# Altium PCB PCB1.PcbDoc
Units mm, origin at the board's own origin, x right, y up, seen from the top; angles counter-clockwise.
Board outline 98.17 x 87.76 mm, 2 copper layers (Top Layer, Bottom Layer); 27 components, 38 nets, 142 pads, 13 vias.
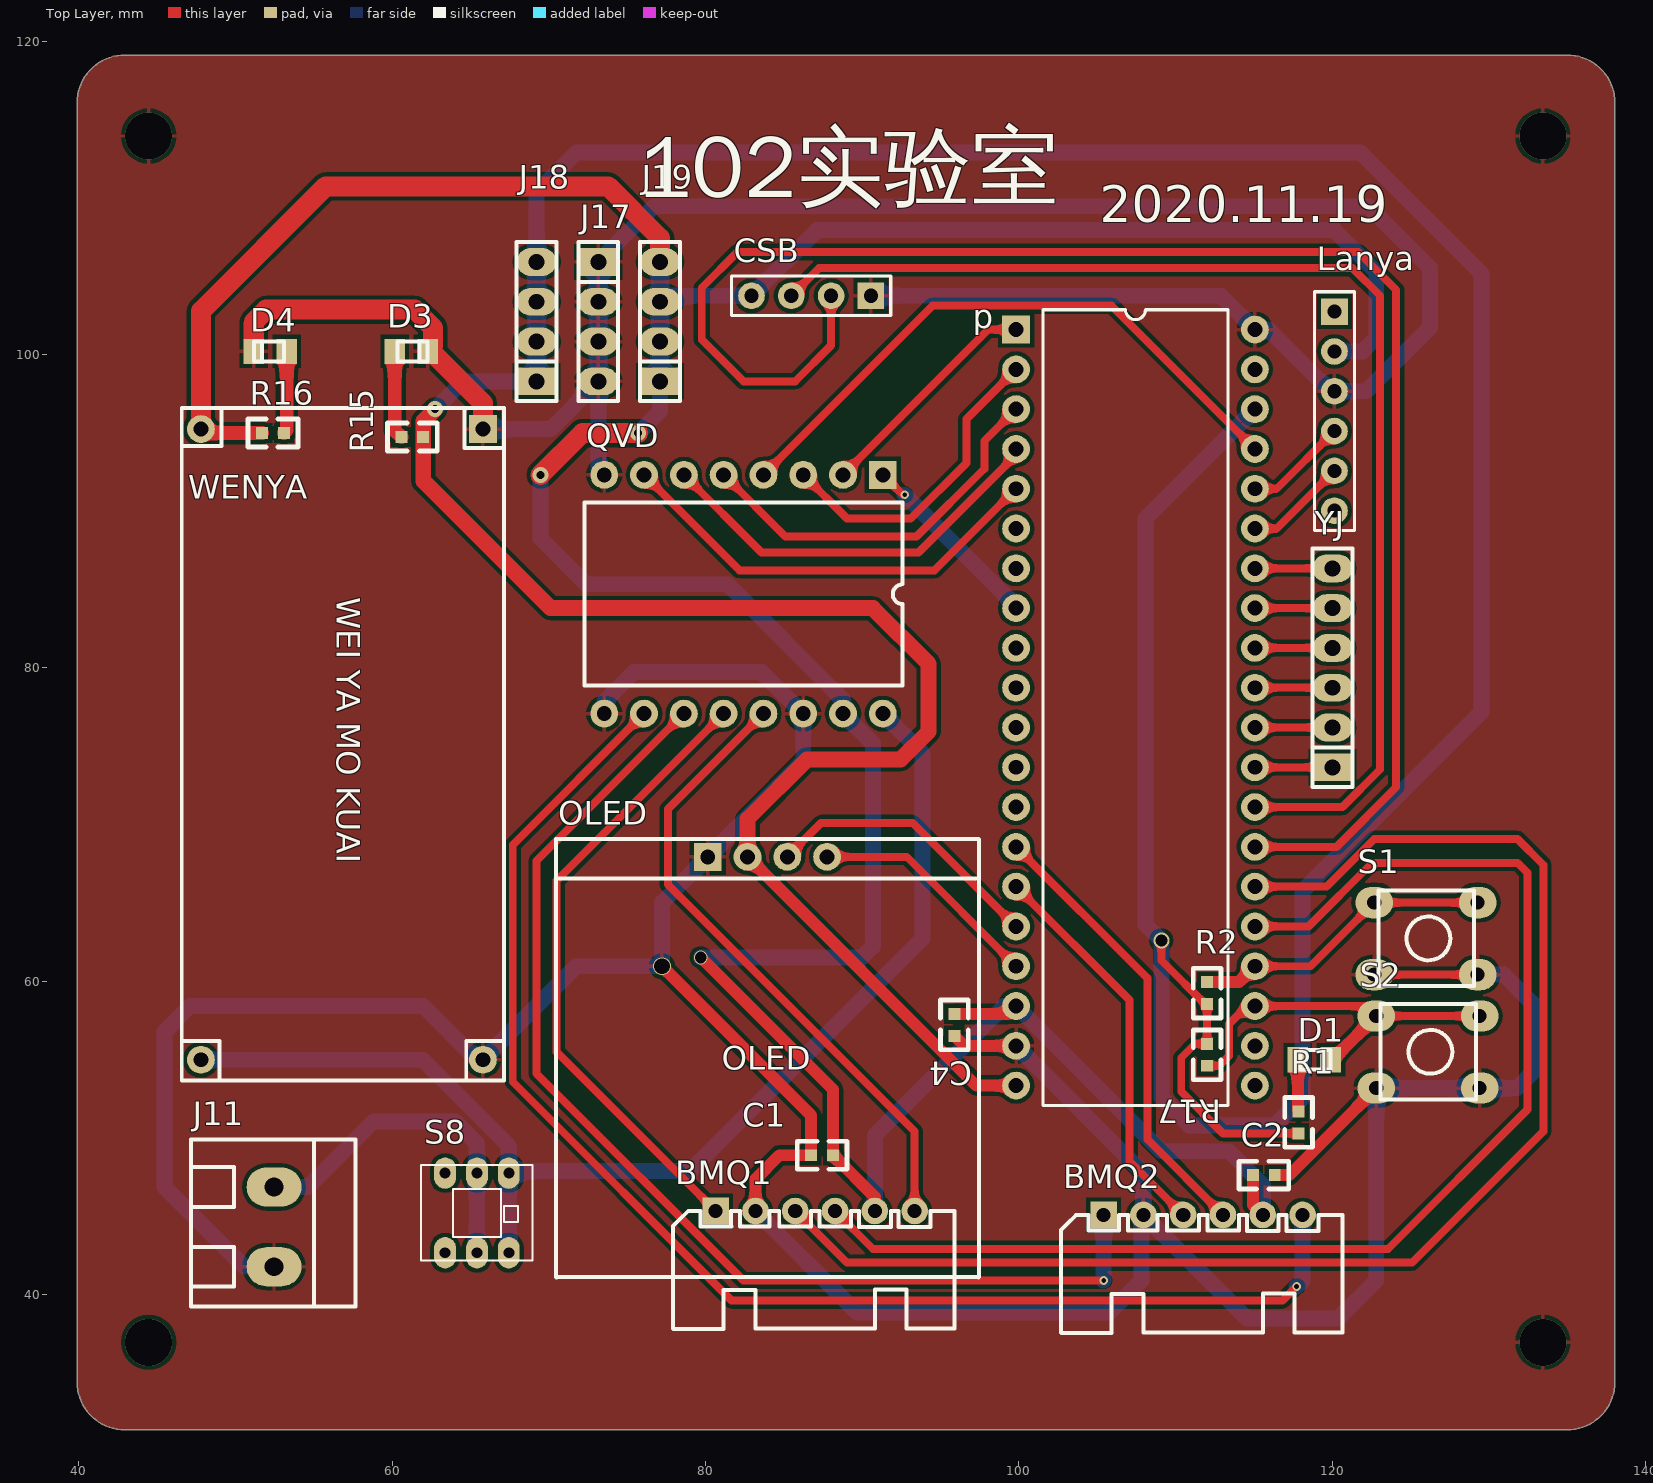
[diagram p0: Top Layer view]
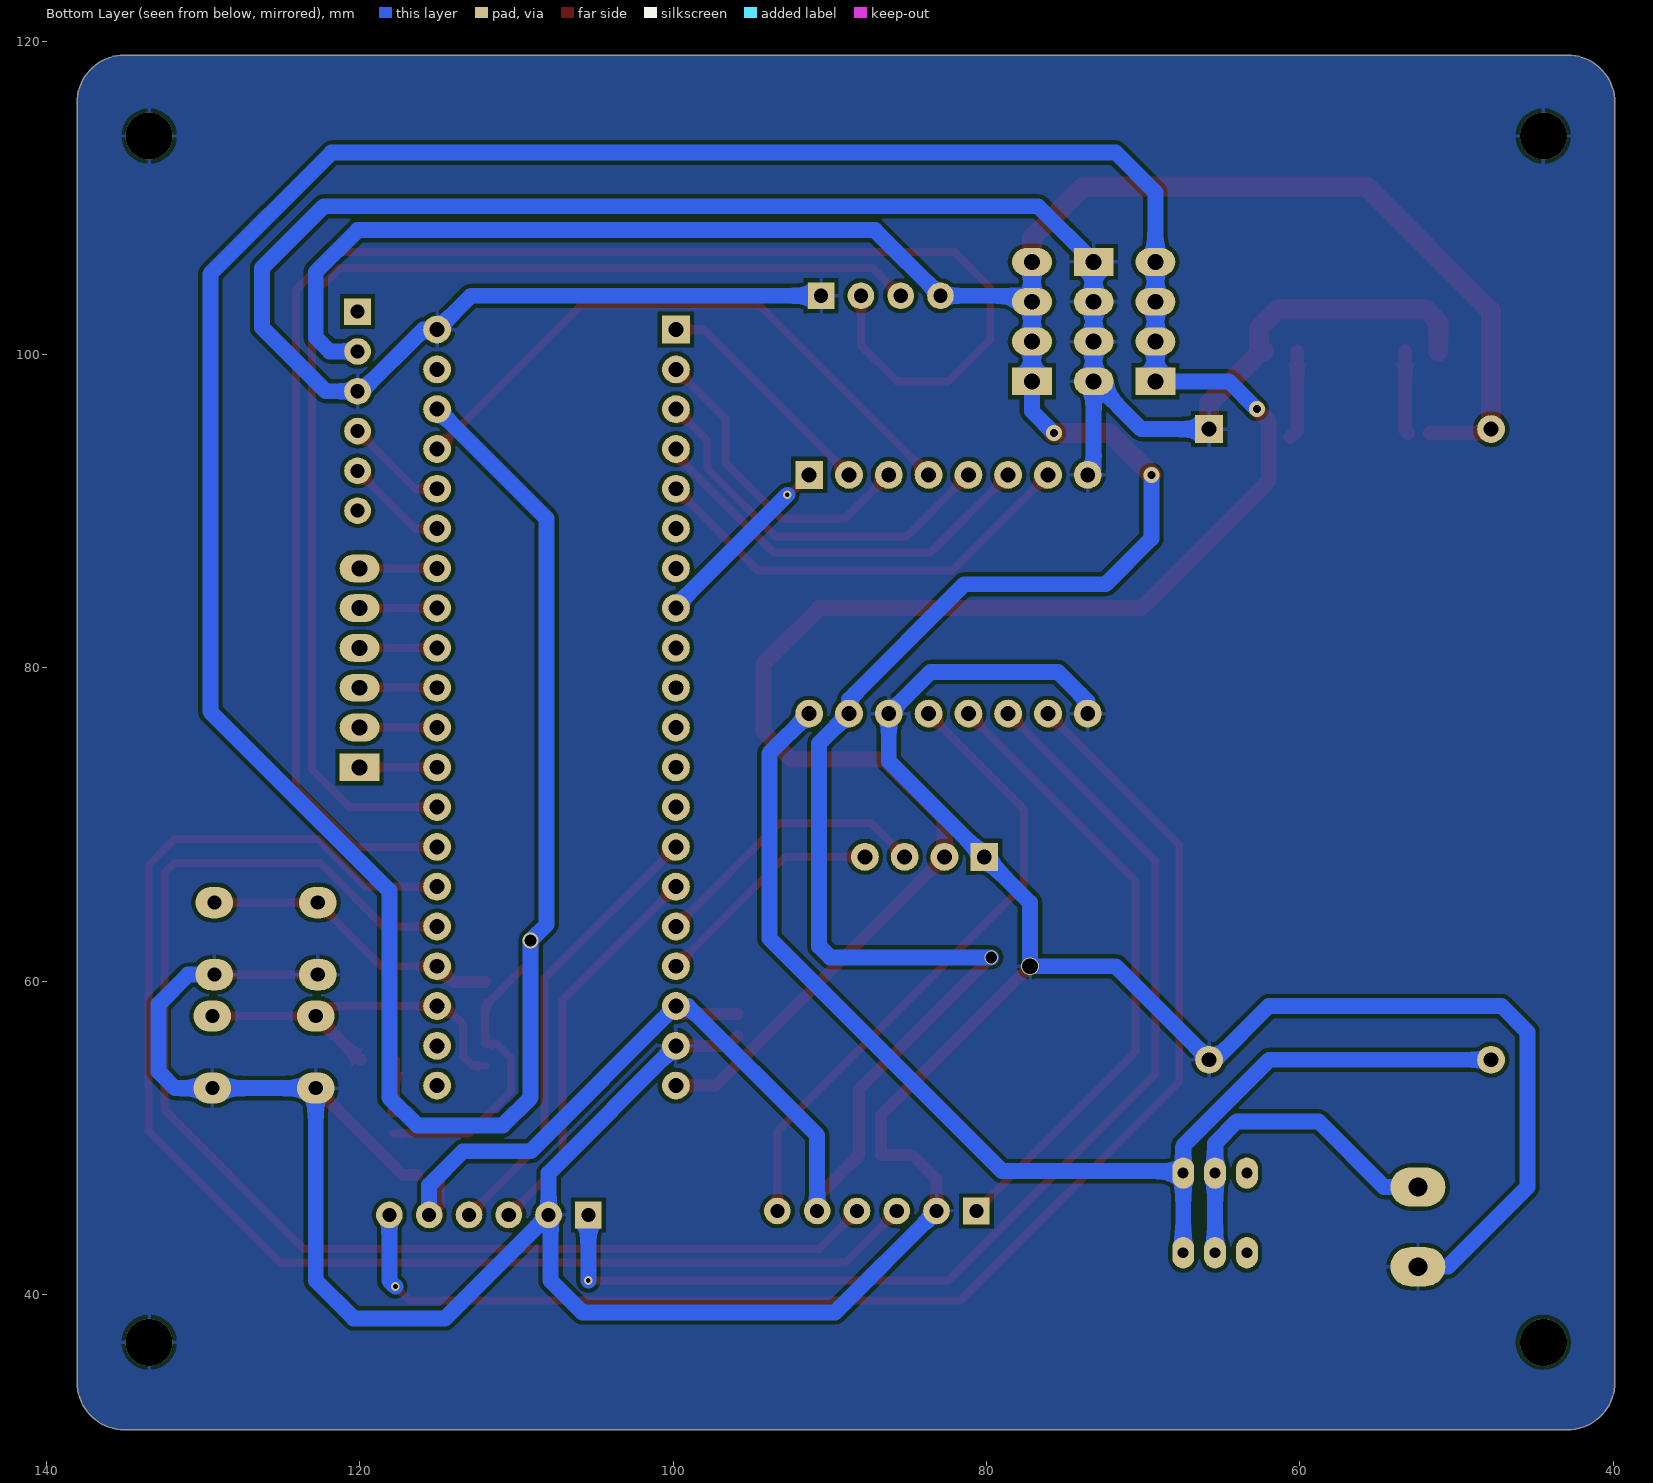
[diagram p1: Bottom Layer view, seen from below]

## Layer stack, top to bottom
Top Solder: solder mask 0.0102, Solder Resist, Dk 3.5
Top Layer: signal copper 0.0356
Dielectric 1: dielectric 0.32, FR-4, Dk 4.8
Bottom Layer: signal copper 0.0356
Bottom Solder: solder mask 0.0102, Solder Resist, Dk 3.5

## Board outline
39.878,34.417 39.878,116.078 cw(c42.926,116.078) 42.926,119.126 135.001,119.126 cw(c135.001,116.078) 138.049,116.078 138.049,34.417 cw(c135.001,34.417) 135.001,31.369 42.926,31.369 cw(c42.926,34.417)

## Design rules (kind name [scope] priority, off if disabled: settings)
Clearance [All] p1: gap=0.254 ignorepadtopadclearanceinfootprint=FALSE except(0: Arc-Hole Track-Hole SMDPad-Hole THPad-Hole Via-Hole Fill-Hole Poly-Hole Region-Hole Text-Hole)
PolygonConnect [All] p1: connectstyle=Relief reliefconductorwidth=0.254 reliefentries=4 polygonreliefangle="90 Angle" airgapwidth=0.254
RoutingVias [All] p1: holewidth=0.711 width=1.27 viastyle="Through Hole" minholewidth=0.711 minwidth=1.27 maxholewidth=0.711 maxwidth=1.27
SolderMaskExpansion [All] p1: expansion=0.102
Width [All] p1: maxlimit=2.032 minlimit=0.254 preferedwidth=1.016
30 further rules are at their usual default settings.

## Components (designator, comment, footprint, x,y, rotation, side; value= is the part's Value field where it differs from the comment)
BMQ1 "HDR-1X6" XH2.54-WI-6P 86.995,45.339 r0 top
BMQ2 "HDR-1X6" XH2.54-WI-6P 111.76,45.085 r0 top
C1 "100nf" 0603 88.138,48.895 r180 top
C2 "100nf" 0603 114.935,47.625 r0 top
C4 "CAP1" 0603 95.885,57.912 r270 top
CSB "CON4" HDR2.54-M-LI-4P 86.741,103.759 r180 top
D1 "LED" LED_0805 118.872,54.991 r0 top
D3 "LED" LED_0805 61.224,100.203 r0 top
D4 "LED" LED_0805 52.197,100.203 r180 top
J11 "CON2" KF128-5.08-2P 52.451,44.323 r270 top
J17 "CON4" sip-4 73.152,105.918 r270 top
J18 "CON4" sip-4 69.215,98.298 r90 top
J19 "CON4" sip-4 77.089,98.298 r90 top
Lanya "CON6" HDR2.54-M-LI-6P 120.142,96.393 r270 top
OLED "CON4" OLED 80.137,67.945 r0 top
p "STM32单片机最小系统" "PCBComponent_1 - duplicate" 110.109,77.724 r0 top
QVD "电机驱动" DIP16P 91.313,92.329 r270 top
R1 "1K" 0603 117.856,50.292 r90 top
R2 "10K" 0603 112.014,58.547 r90 top
R15 "1K" 0603 61.976,94.742 r180 top
R16 "1K" 0603 51.689,94.996 r0 top
R17 "10K" 0603 112.014,56.007 r270 top
S1 "SW-PB" SW6*6 122.686,65.024 r0 top
S2 "SW-PB" SW6*6 122.813,57.785 r0 top
S8 "SW-DPDT" SWH7*7 63.373,47.752 r0 top
WENYA "CON4" "WEI YA" 65.786,95.25 r270 top
YJ "CON6" sip-6 120.015,73.66 r90 top

## Footprints (in the part's own frame and the unit in brackets; to place one, negate y for a bottom-side part, rotate by r counter-clockwise, add the part's x,y. Pads: shape width x height; smd on the part's side, far side on the other; paste and mask are expansions set on the pad)
0603 [mil]
  rect 30x30 smd: 1(0,0) 2(55,0)
  silkscreen extent -35,-35 90,35
DIP16P [mil]
  rect 70x70 hole 37.5: 1(0,0)
  round 70 hole 37.5: 2(0,-100) 3(0,-200) 4(0,-300) 5(0,-400) 6(0,-500) 7(0,-600) 8(0,-700) 9(600,-700) 10(600,-600) 11(600,-500) 12(600,-400) 13(600,-300) 14(600,-200) 15(600,-100) 16(600,0)
  silkscreen extent 70,-750 530,50
HDR2.54-M-LI-4P [mm] "排母，4脚  淘宝ID:黄晶宝石   店铺网址:https://shop463601444.taobao.com"
  rect 1.7x1.7 hole 0.9: 1(-3.81,0)
  round 1.7 hole 0.9: 2(-1.27,0) 3(1.27,0) 4(3.81,0)
  silkscreen extent -5.08,-1.27 5.08,1.27, body extent -5.08,-1.27 5.08,1.27, height 8.5
HDR2.54-M-LI-6P [mm] "排母，6脚  淘宝ID:黄晶宝石   店铺网址:https://shop463601444.taobao.com"
  rect 1.7x1.7 hole 0.9: 1(-6.35,0)
  round 1.7 hole 0.9: 2(-3.81,0) 3(-1.27,0) 4(1.27,0) 5(3.81,0) 6(6.35,0)
  silkscreen extent -7.62,-1.27 7.62,1.27, body extent -7.62,-1.27 7.62,1.27, height 8.5
KF128-5.08-2P [mm] "螺钉式接线端子，脚距5.08mm"
  oval 2.5x3.5 hole 1.2: 1(-2.54,0) 2(2.54,0)
  silkscreen extent -5.59,-5.31 5.08,5.21, body extent -5.58,-5.3 5.08,5.2, height 14.15
LED_0805 [mm]
  rect 1.3x1.6 smd: 1(-1.067,0) 2(1.041,0)
  silkscreen extent -0.89,-0.64 1.02,0.64
OLED [mil]
  rect 70x70 hole 37.5: 1(0,0)
  round 70 hole 37.5: 2(100,0) 3(200,0) 4(300,0)
  silkscreen extent -381,-1057 681,45, body extent -375,50 -375,50, height 10
"PCBComponent_1 - duplicate" [mil]
  round 70 hole 37.4: 1(195,940) 2(195,840) 3(195,740) 4(195,640) 5(195,540) 6(195,440) 7(195,340) 8(195,240) 9(195,140) 10(195,40) 11(195,-60) 12(195,-160) 13(195,-260) 14(195,-360) 15(195,-460) 16(195,-560) 17(195,-660) 18(195,-760) 19(195,-860) 20(195,-960) 21(-405,-960) 22(-405,-860) 23(-405,-760) 24(-405,-660) 25(-405,-560) 26(-405,-460) 27(-405,-360) 28(-405,-260) 29(-405,-160) 30(-405,-60) 31(-405,40) 32(-405,140) 33(-405,240) 34(-405,340) 35(-405,440) 36(-405,540) 37(-405,640) 38(-405,740) 39(-405,840)
  rect 70x70 hole 37.4: 40(-405,940)
  silkscreen extent -337,-1010 127,990
sip-4 [mil]
  rect 70x100 hole 40: 1(0,0)
  oval 70x100 hole 40: 2(100,0) 3(200,0) 4(300,0)
  silkscreen extent -50,-50 350,50
sip-6 [mil]
  rect 70x100 hole 40: 1(0,0)
  oval 70x100 hole 40: 2(100,0) 3(200,0) 4(300,0) 5(400,0) 6(500,0)
  silkscreen extent -50,-50 550,50
SW6*6 [mm]
  oval 2.4x2 hole 0.9: 1(0,0) 1(6.6,0) 2(0,-4.6) 2(6.6,-4.6)
  silkscreen extent 0.28,-5.34 6.38,0.76
SWH7*7 [mm]
  oval 1.4x2 hole 0.7: 1(0,0) 2(2.032,0) 3(4.064,0) 4(4.064,-5.08) 5(2.032,-5.08) 6(0,-5.08)
  silkscreen extent -1.52,-5.59 5.59,0.51
"WEI YA" [mil]
  rect 70x70 hole 37.5: 1(0,0)
  round 70 hole 37.5: 2(0,-708.66) 3(1585,0) 4(1585,-708.66)
  silkscreen extent -53,-757 1638,53
XH2.54-WI-6P [mm] "接插件，6P"
  rect 1.7x1.7 hole 0.9: 1(-6.35,0)
  round 1.7 hole 0.9: 2(-3.81,0) 3(-1.27,0) 4(1.27,0) 5(3.81,0) 6(6.35,0)
  silkscreen extent -9.07,-7.53 8.89,0, body extent -8.85,-7.35 8.85,0.35, height 5.75

## Part data
BMQ1 BMQ2: library part "Header 6", "6P接插件", BOM名称=6P接插件, 学习资源=https://shop463601444.taobao.com, 版权归属="封装库来自淘宝 ID：黄晶宝石"
C1 C2: library part CAP1
CSB J11 J17 J18 J19 Lanya OLED WENYA YJ: "Connector"
p QVD: library part Component_1
R1 R2 R15 R16 R17: library part RES, "电阻"

## Via types
v1: diameter 3, hole 3, Top Layer to Bottom Layer, 4 vias
v2: diameter 1.016, hole 0.508, Top Layer to Bottom Layer, 3 vias
v3: diameter 0.559, hole 0.305, Top Layer to Bottom Layer, 3 vias
v4: diameter 1.016, hole 0.762, Top Layer to Bottom Layer, 1 vias
v5: diameter 1.143, hole 1.016, Top Layer to Bottom Layer, 1 vias
v6: diameter 0.889, hole 0.762, Top Layer to Bottom Layer, 1 vias

## Nets (pads, with @x,y where several pads share a name; then routed paths per layer and width w, separated by ;. In a path a pad name is that pad's centre, name@x,y a point inside that pad or via, vN(x,y) a via of type N, cw(c..) or ccw(c..) an arc to the next point about the centre after c; other vN are vias at no path point)
3V3: J18.1 J18.2 J18.3 J18.4 OLED.2 p.3 p.21 R1.1 R2.1 R15.1 R17.1 | length 305.5
  Top Layer w0.508: v4@108.966,62.484 v4(109.093,62.611) 109.093,61.341 112.014,58.42 R17.1 111.252,56.007 110.363,55.118 110.363,52.959 113.03,50.292 R1.1
  Top Layer w0.762: OLED.2 97.282,53.34 p.21
  Top Layer w1.016: v2(62.738,96.52) 61.976,95.758 R15.1 61.976,91.948 70.104,83.82 90.678,83.82 94.234,80.264 94.234,75.946 92.456,74.168 86.487,74.168 82.677,70.358 OLED.2
  Bottom Layer w1.016: v2(62.738,96.52) 64.516,98.298 J18.1 J18.2 J18.3 J18.4 69.215,110.363 71.755,112.903 121.793,112.903 129.54,105.156 129.54,77.216 118.11,65.786 118.11,52.578 116.332,50.8 110.871,50.8 109.093,52.578 v4(109.093,62.611) 108.077,63.627 108.077,89.535 p.3
5V: BMQ1.5 BMQ2.5 C1.1 C2.1 C4.1 CSB.4 J19.1 J19.2 J19.3 J19.4 Lanya.2 p.23 QVD.15 R16.1 WENYA.2 | length 244.6
  Top Layer w0.762: v6(79.692,61.531) 88.138,53.086 C1.1 90.805,46.228 BMQ1.5 ; C4.1 99.314,57.912 p.23 ; C2.1 114.935,45.72 BMQ2.5
  Top Layer w0.889: WENYA.2 48.04,94.996 R16.1
  Top Layer w1.27: WENYA.2 47.786,102.777 55.753,110.744 73.787,110.744 77.089,107.442 J19.4 ; v2(69.469,92.329) 72.136,94.996 v2(75.692,94.996)
  Bottom Layer w1.016: v2(69.469,92.329) 69.469,88.265 72.39,85.344 81.407,85.344 88.773,77.978 QVD.15 90.678,75.184 90.678,62.23 89.98,61.531 v6(79.692,61.531) ; v2(75.692,94.996) 77.089,96.393 J19.1 J19.2 J19.3 ; J19.4 J19.3 ; BMQ1.5 90.805,50.165 99.06,58.42 p.23 109.093,49.149 113.411,49.149 115.57,46.99 BMQ2.5 ; Lanya.2 121.92,100.203 122.813,101.096 122.813,105.279 120.142,107.95 87.122,107.95 CSB.4 77.47,103.759 J19.3
12V: QVD.16 S8.3 S8.4 WENYA.4 | length 76.8
  Bottom Layer w1.016: WENYA.4 61.948,54.991 67.437,49.502 S8.3 ; S8.4 S8.3 ; QVD.16 93.853,74.549 93.853,62.738 78.994,47.879 67.564,47.879 S8.3
A01: BMQ1.6 QVD.13 | length 40.8
  Top Layer w0.508: QVD.13 77.597,70.993 77.597,66.167 93.345,50.419 BMQ1.6
A02: BMQ1.1 QVD.12 | length 40.4
  Top Layer w0.508: BMQ1.1 70.485,55.499 70.485,66.421 QVD.12
B01: BMQ2.6 QVD.10 | length 87.9
  Top Layer w0.508: QVD.10 67.691,68.707 67.691,53.594 81.661,39.624 116.84,39.624 v3(117.729,40.513)
  Bottom Layer w1.016: v3(117.729,40.513) 118.11,40.894 BMQ2.6
B02: BMQ2.1 QVD.11 | length 72.7
  Top Layer w0.508: QVD.11 69.215,67.691 69.215,54.102 82.423,40.894 v3(105.41,40.894)
  Bottom Layer w1.016: v3(105.41,40.894) BMQ2.1
GND: BMQ1.2 BMQ2.2 C1.2 C2.2 C4.2 CSB.1 D3.2 D4.2 J11.2 J17.1 J17.2 J17.3 J17.4 Lanya.3 OLED.1 p.1 p.22 QVD.8 QVD.9 QVD.14 S1.2 S2.2 WENYA.1 WENYA.3 | length 373.5
  Top Layer w0.508: S1.2@122.686,60.424 S1.2@129.286,60.424
  Top Layer w0.762: v5(77.216,60.96) 86.741,51.435 C1.2 84.709,48.895 83.185,47.371 BMQ1.2 ; C4.2 96.52,55.88 p.22 ; C2.2 117.253,47.625 S2.2@122.813,53.185
  Top Layer w1.27: D4.2 51.156,102.083 51.943,102.87 61.45,102.87 62.611,101.709 62.611,100.548 D3.2 62.484,100.203 65.786,96.901 WENYA.1
  Bottom Layer w1.016: J11.2 50.546,41.783 45.466,46.863 45.466,56.769 47.117,58.42 61.976,58.42 65.405,54.991 WENYA.3 71.755,60.96 v5(77.216,60.96) 77.216,65.024 OLED.1 86.233,74.041 QVD.14 83.566,79.756 75.438,79.756 73.533,77.851 QVD.9 ; WENYA.1 70.104,95.25 J17.4 ; QVD.8 73.152,92.71 J17.4 ; BMQ1.2 89.662,38.862 105.791,38.862 107.823,40.894 107.823,44.958 BMQ2.2 ; CSB.1 112.903,103.759 p.1 115.951,101.6 119.888,97.663 Lanya.3 122.174,97.663 126.238,101.727 126.238,105.537 122.301,109.474 76.708,109.474 J17.1 J17.2 J17.3 J17.4 ; p.22 107.95,47.752 BMQ2.2 ; S1.2@129.286,60.424 130.965,60.424 132.842,58.547 132.842,54.229 131.798,53.185 129.413,53.185 122.813,53.185 122.813,40.898 120.396,38.481 114.554,38.481 BMQ2.2
  other v1: 133.45,36.957 44.45,113.957 133.45,113.957
NetD1_1: D1.1 R1.2 | length 3.3
  Top Layer w0.762: D1.1 117.805,51.74 R1.2
NetD3_1: D3.1 R15.2 | length 5.6
  Top Layer w0.889: D3.1 60.158,95.163 R15.2
NetD4_1: D4.1 R16.2 | length 5.3
  Top Layer w0.889: R16.2 53.264,95.174 D4.1
NetJ11_1: J11.1 S8.2 S8.5 | length 22.3
  Bottom Layer w1.016: J11.1 54.61,46.863 58.801,51.054 64.008,51.054 65.405,49.657 S8.2 S8.5
Netp_4: p.4 QVD.4 | length 40
  Top Layer w0.508: QVD.4@83.693,92.71 QVD.4 94.488,103.124 105.918,103.124 p.4
PA0: BMQ1.4 p.16 | length 83.3
  Top Layer w0.508: BMQ1.4 90.678,42.926 123.571,42.926 132.461,51.816 132.461,66.929 131.826,67.564 122.555,67.564 118.491,63.5 p.16
PA1: BMQ1.3 p.15 | length 90
  Top Layer w0.508: BMQ1.3 89.027,42.037 125.095,42.037 133.477,50.419 133.477,67.437 131.826,69.088 122.682,69.088 119.634,66.04 p.15
PA2: CSB.2 p.14 | length 105.4
  Top Layer w0.508: CSB.2 88.011,100.584 85.725,98.298 82.423,98.298 79.756,100.965 79.756,104.267 82.042,106.553 121.666,106.553 124.079,104.14 124.079,72.39 120.269,68.58 p.14
PA3: CSB.3 p.13 | length 78.3
  Top Layer w0.508: CSB.3 87.249,105.537 121.285,105.537 123.063,103.759 123.063,73.533 120.65,71.12 p.13
PA4: p.12 YJ.1 | length 5
  Top Layer w0.508: p.12 YJ.1
PA5: p.11 YJ.2 | length 5
  Top Layer w0.508: p.11 YJ.2
PA6: p.10 YJ.3 | length 5
  Top Layer w0.508: p.10 YJ.3
PA7: p.9 YJ.4 | length 5
  Top Layer w0.508: p.9 YJ.4
PA8: p.36 QVD.7 | length 28.4
  Top Layer w0.508: QVD.7 82.169,86.233 94.615,86.233 p.36
PA11: p.33 QVD.1 | length 12.1
  Top Layer w0.508: QVD.1 92.583,91.059 v3(92.71,91.059)
  Bottom Layer w1.016: v3(92.71,91.059) 99.822,83.947 p.33
PB0: p.8 YJ.5 | length 5
  Top Layer w0.508: p.8 YJ.5
PB1: p.7 YJ.6 | length 5
  Top Layer w0.508: p.7 YJ.6
PB5: p.28
PB6: BMQ2.4 p.27 | length 29
  Top Layer w0.508: p.27 108.204,60.198 108.204,49.911 BMQ2.4
PB7: BMQ2.3 p.26 | length 25.4
  Top Layer w0.508: p.26 107.061,58.801 107.061,48.514 BMQ2.3
PB8: OLED.3 p.25 | length 18.2
  Top Layer w0.508: OLED.3 87.376,70.104 93.218,70.104 p.25
PB9: OLED.4 p.24 | length 15
  Top Layer w0.508: OLED.4 92.837,67.945 p.24
PB10: Lanya.5 p.6 | length 6.6
  Top Layer w0.508: p.6 116.459,88.9 Lanya.5
PB11: Lanya.4 p.5 | length 6.6
  Top Layer w0.508: p.5 116.459,91.44 Lanya.4
PB12: p.40 QVD.2 | length 14.9
  Top Layer w0.508: QVD.2 98.044,101.6 p.40
PB13: p.39 QVD.3 | length 20.3
  Top Layer w0.508: QVD.3 89.027,89.535 93.091,89.535 96.647,93.091 96.647,95.885 p.39
PB14: p.38 QVD.5 | length 24.7
  Top Layer w0.508: QVD.5 85.09,88.392 93.472,88.392 97.79,92.71 97.79,94.488 p.38
PB15: p.37 QVD.6 | length 26.2
  Top Layer w0.508: QVD.6 83.566,87.376 93.599,87.376 99.822,93.599 p.37
PC14: D1.2 p.18 R17.2 S2.1 | length 24.5
  Top Layer w0.508: R17.2 112.776,54.61 113.411,55.245 113.411,57.277 114.554,58.42 p.18 122.178,58.42 122.813,57.785 S2.1@129.413,57.785
  Top Layer w0.762: D1.2 120.019,54.991 S2.1@122.813,57.785
PC15: p.17 R2.2 S1.1 | length 19.4
  Top Layer w0.508: p.17 118.622,60.96 122.686,65.024 S1.1@129.286,65.024
  Top Layer w0.762: R2.2 114.046,59.944 p.17
pads on no net: Lanya.1 Lanya.6 p.2 p.19 p.20 p.29 p.30 p.31 p.32 p.34 p.35 S8.1 S8.6
copper on no net:
  other v1: 44.45,36.957

## Polygon pours and split planes (outlines as drawn)
GND on Top Layer "GND_L01_P010" (solid, remove dead copper, pour order 10): 39.878,34.417 39.878,116.078 cw(c42.926,116.078) 42.926,119.126 135.001,119.126 cw(c135.001,116.078) 138.049,116.078 138.049,34.417 cw(c135.001,34.417) 135.001,31.369 42.926,31.369 cw(c42.926,34.417)
GND on Bottom Layer "GND_L02_P011" (solid, remove dead copper, pour order 11): 39.878,34.417 39.878,116.078 cw(c42.926,116.078) 42.926,119.126 135.001,119.126 cw(c135.001,116.078) 138.049,116.078 138.049,34.417 cw(c135.001,34.417) 135.001,31.369 42.926,31.369 cw(c42.926,34.417)

## Other copper
Bottom Layer:

## Silkscreen, mask and mechanical layers (free items; w line width, h text height)
Top Overlay:
  text "102实验室" at 75.775,108.712 h7
  text "2020.11.19" at 105.156,107.696 h4
Mechanical 1:
  lines w1.016: 40.386,114.173 40.386,116.078 cw(c42.926,116.078) 42.926,118.618 135.001,118.618 cw(c135.001,116.078) 137.541,116.078 137.541,46.99 137.541,34.417 cw(c135.001,34.417) 135.001,31.877 50.038,31.877 42.926,31.877 cw(c42.926,34.417) 40.386,34.417 40.386,114.554 40.386,115.951 ; 133.477,118.618 134.874,118.618

## Text inside footprints (layer, text, board x,y; h text height)
WENYA: Top Overlay "WEI YA MO KUAI" at 56.469,84.519 h1.52 r270